# EAGLE board i2c2midi_panel (EAGLE 9.6.2)
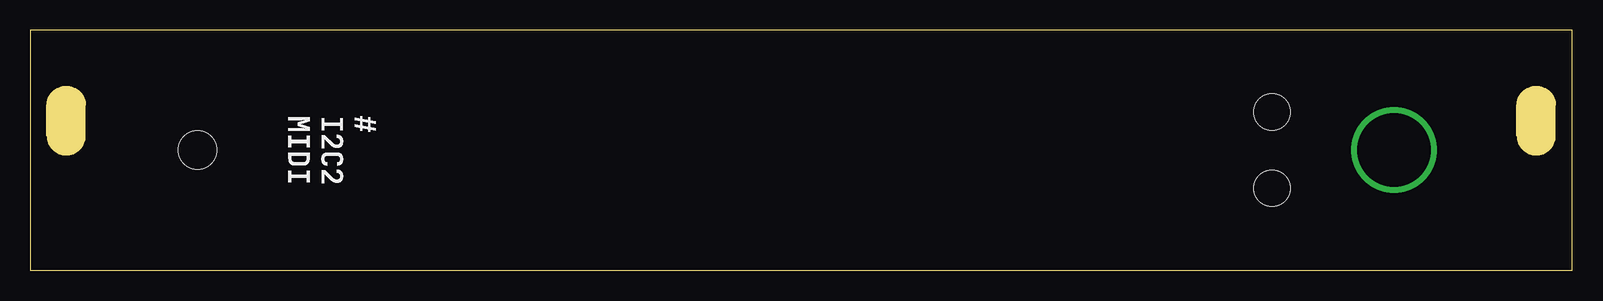
[diagram p0: board, top side]
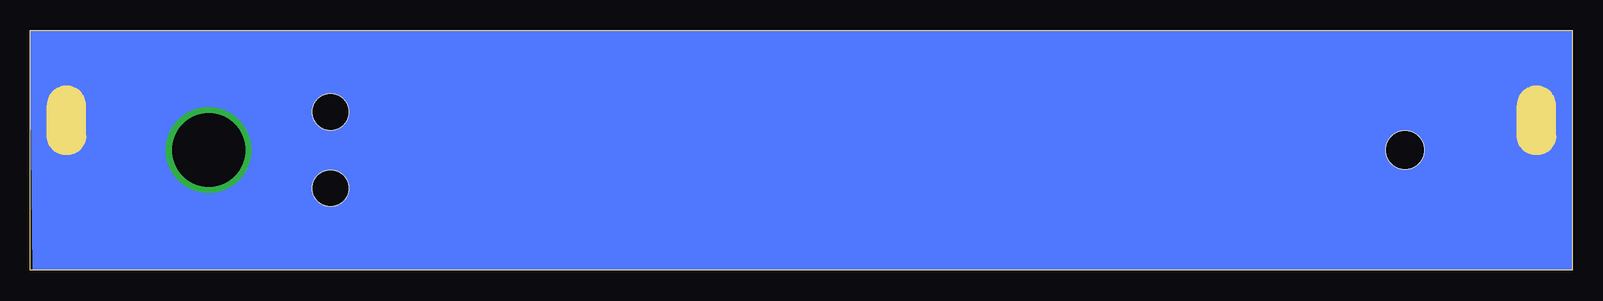
[diagram p1: board, bottom side, seen from below]

Size 128.5 x 20 mm. Coordinates in mm from the lower left corner, seen from the top.
Copper layers (1*16): Top 0.035mm / dielectric 1.5mm / Bottom 0.035mm
Design rules "default": minimum track width 6mil, minimum drill 0.35mm, track to track 6mil, track to pad 6mil, pad to pad 6mil, via to via 6mil, smd to smd 6mil, copper to edge 40mil, drill to drill 6mil, minimum pad ring 10mil, minimum via ring 8mil, stop-mask expansion 4mil, vias tented up to drill 0mil, thermal gap 10mil
Holes 3.2 mm at 13.95,10.03
Holes 3 mm at 103.48,13.2 103.48,6.85

## Footprints (pad centres in the part's own frame; a part is rotated, then mirrored left to right if it is on the bottom)
PANEL_THONK_SOCKET = drill 6.1: P$1 0,0

## Placement (x,y rotation side)
E$1  [PANEL_THONK_SOCKET]  113.64,10.03 0 top
U$1  [PANEL_4HP]  0,0 0 top

## Library data of the parts
E$1 U$1 = MusicThingModular

## Tracks (layer width: path | path; a pad name or v marks a point on that pad's centre or on a via)
HEAT
  pour Bottom: 76.81,12.56 76.81,6.85 71.73,1.77 71.09,1.77 73.64,4.31 73,4.31 70.46,1.77 69.83,1.77 72.36,4.31 71.73,4.31 69.19,1.77 68.56,1.77 71.09,4.31 70.46,4.31 67.92,1.77 67.28,1.77 69.83,4.31 69.19,4.31 66.65,1.77 66.02,1.77 68.56,4.31 67.92,4.31 65.38,1.77 64.75,1.77 67.28,4.31 66.65,4.31 64.11,1.77 63.48,1.77 66.02,4.31 65.38,4.31 62.84,1.77 62.2,1.77 64.75,4.31 64.11,4.31 61.57,1.77 60.94,1.77 63.48,4.31 62.84,4.31 60.3,1.77 59.66,1.77 62.2,4.31 61.57,4.31 59.03,1.77 58.4,1.77 60.94,4.31 60.3,4.31 57.76,1.77 57.12,1.77 59.66,4.31 59.03,4.31 56.49,1.77 55.85,1.77 59.66,5.58 59.66,10.03 57.76,11.93 57.76,15.74 73.64,15.74